# Altium PCB currentAmp.PcbDoc
Units mil, origin at the board's own origin, x right, y up, seen from the top; angles counter-clockwise.
Board outline 6000 x 4000 mil, 2 copper layers (Top Layer, Bottom Layer); 16 components, 19 nets, 72 pads, 0 vias.
Unrouted connection lines stored in the file: 8.
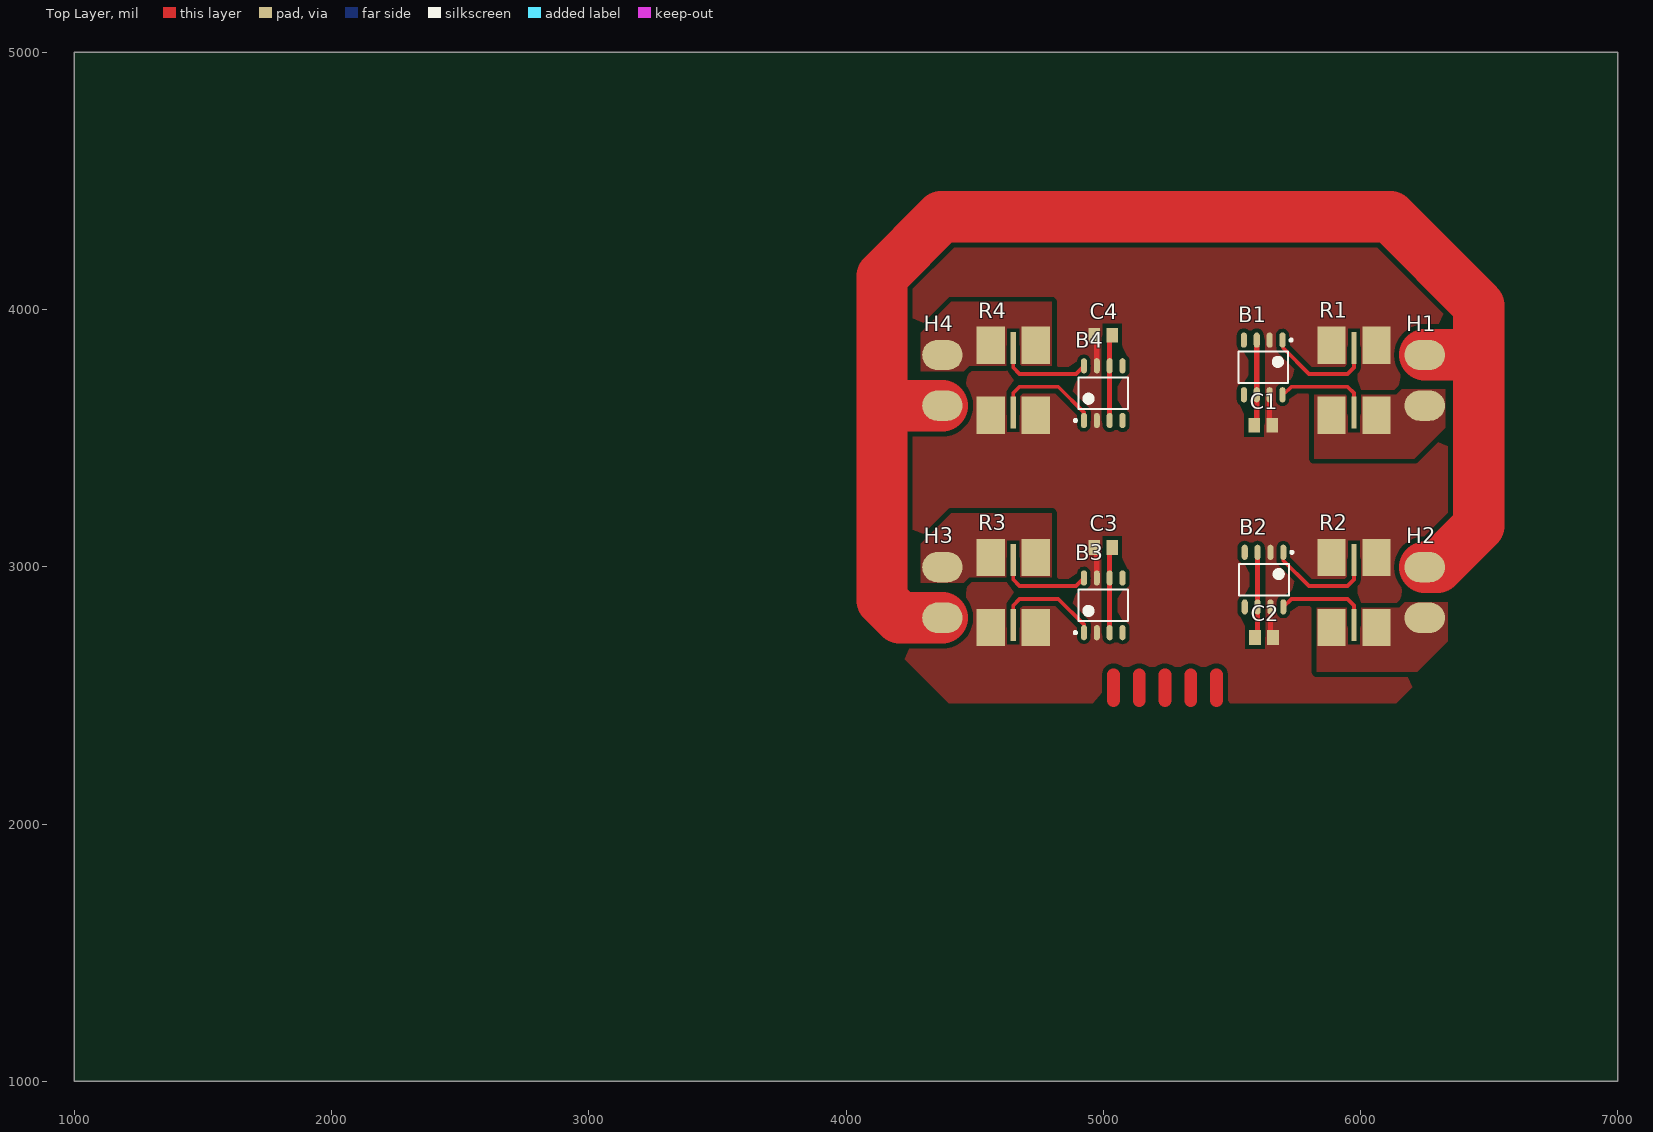
[diagram p0: Top Layer view]
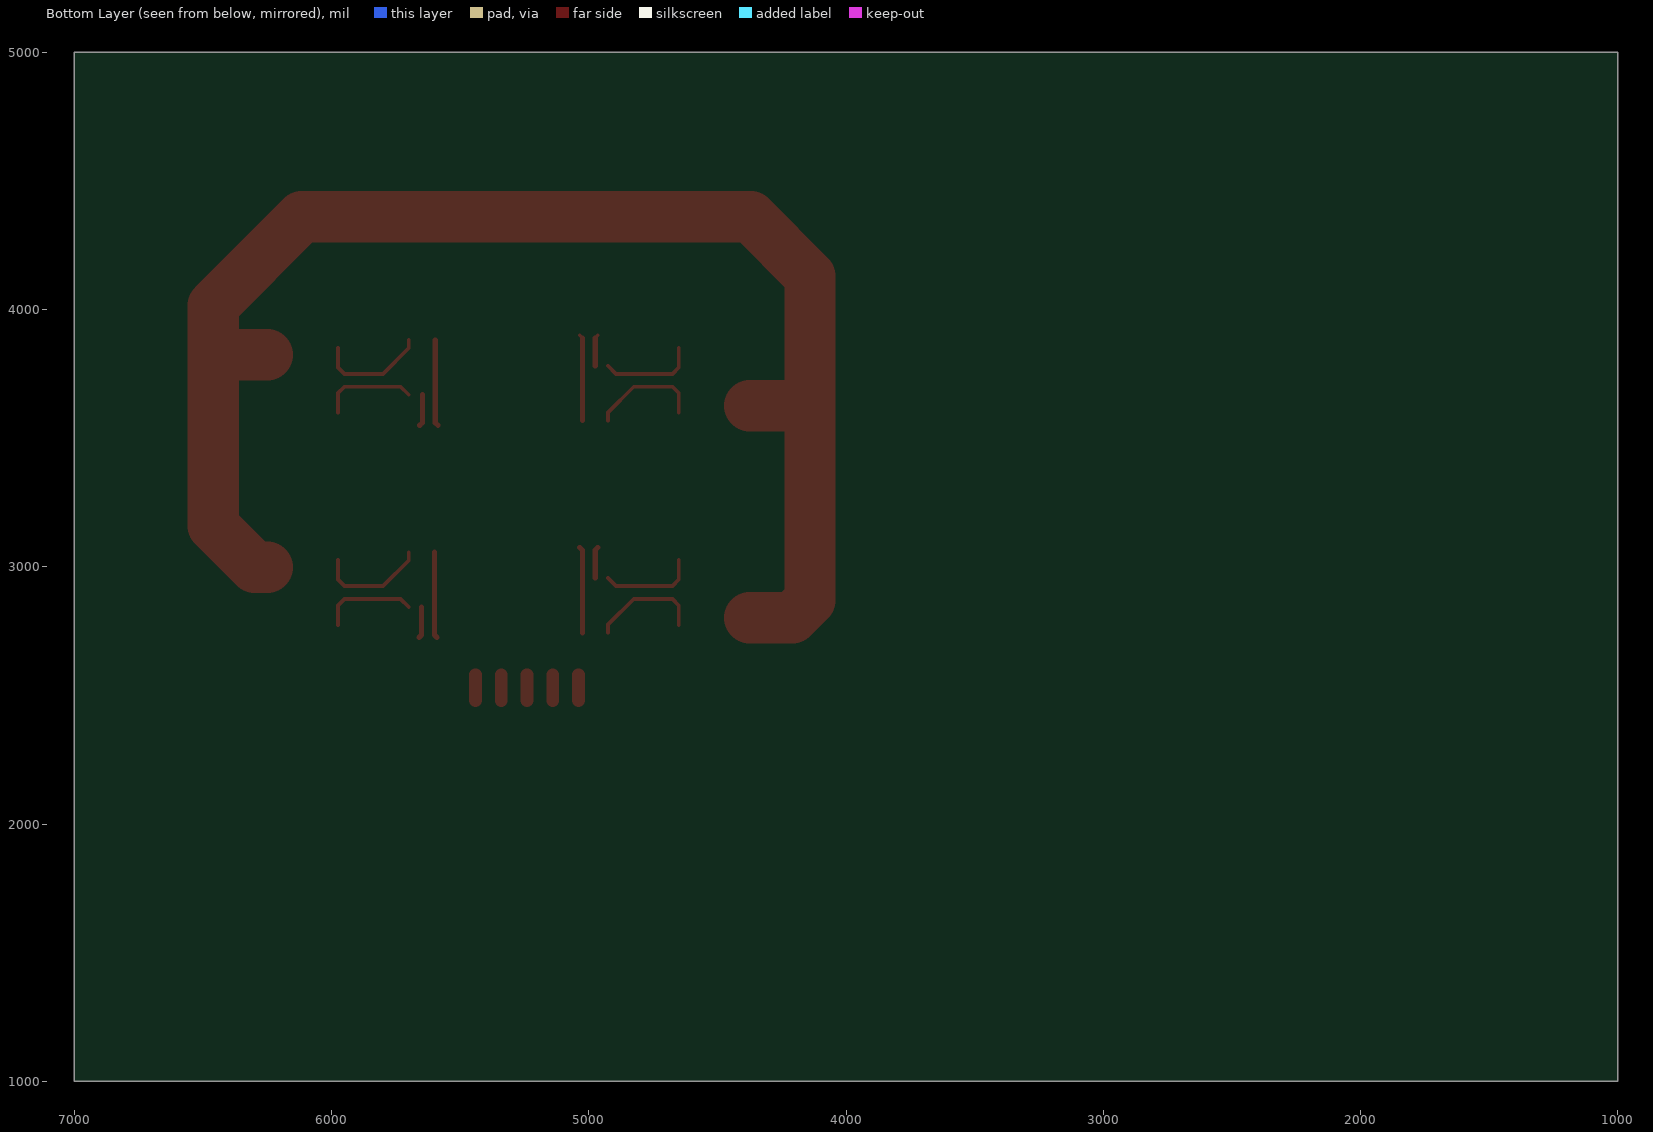
[diagram p1: Bottom Layer view, seen from below]
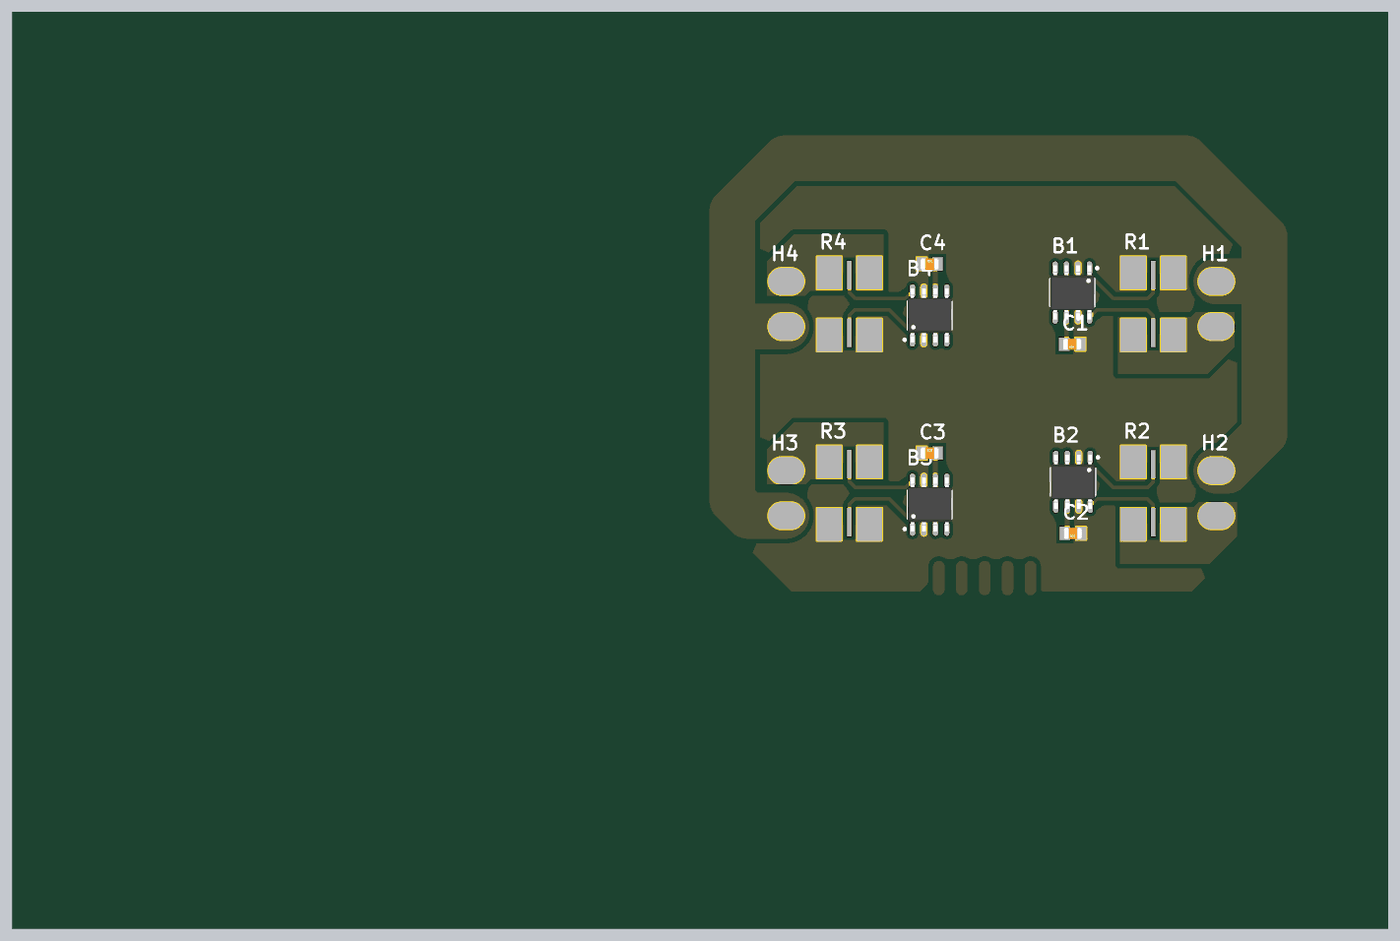
[diagram p2: 3D render of the assembled board from above, using the file's embedded part models]

## Layer stack, top to bottom
Top Solder: solder mask 0.4, Solder Resist, Dk 3.5
Top Layer: signal copper 1.4
Dielectric 1: dielectric 12.6, FR-4, Dk 4.8
Bottom Layer: signal copper 1.4
Bottom Solder: solder mask 0.4, Solder Resist, Dk 3.5

## Board outline
1000,1000 7000,1000 7000,5000 1000,5000

## Design rules (kind name [scope] priority, off if disabled: settings)
Clearance [All] p1: gap=10 ignorepadtopadclearanceinfootprint=FALSE except(0: Arc-Hole Track-Hole SMDPad-Hole THPad-Hole Via-Hole Fill-Hole Poly-Hole Region-Hole Text-Hole; 15: SMDPad-Poly; 20: Arc-Poly Track-Poly THPad-Poly Via-Poly Fill-Poly Poly-Poly)
PolygonConnect [All] p1: connectstyle=Direct reliefconductorwidth=10 reliefentries=4 polygonreliefangle="90 Angle" airgapwidth=10
RoutingVias [All] p1: holewidth=28 width=50 viastyle="Through Hole" minholewidth=28 minwidth=50 maxholewidth=28 maxwidth=50
SolderMaskExpansion [All] p1: expansion=4
Width [All] p1: maxlimit=10000 minlimit=10 preferedwidth=10 minimp=50.000000 maximp=50.000000 favimp=50.000000
30 further rules are at their usual default settings.

## Components (designator, comment, footprint, x,y, rotation, side; value= is the part's Value field where it differs from the comment)
B1 "INA282AIDR" SOIC127P600X175-8N 5621.81,3775 r270 top
B2 "INA282AIDR" SOIC127P600X175-8N 5625,2950 r270 top
B3 "INA282AIDR" SOIC127P600X175-8N 5000,2850 r90 top
B4 "INA282AIDR" SOIC127P600X175-8N 5000,3675 r90 top
C1 "4.7uF (475) 10% 25V" 0805_C 5621.81,3550 r180 top
C2 "4.7uF (475) 10% 25V" 0805_C 5625,2725 r180 top
C3 "4.7uF (475) 10% 25V" 0805_C 5000,3075 r0 top
C4 "4.7uF (475) 10% 25V" 0805_C 5000,3900 r0 top
H1 "XTx0" "XT30-PW - SMD" 6250,3725 r270 top
H2 "XTx0" "XT30-PW - SMD" 6250,2900 r270 top
H3 "XTx0" "XT30-PW - SMD" 4375,2900 r90 top
H4 "XTx0" "XT30-PW - SMD" 4375,3725 r90 top
R1 "Res Kelvin" OARS-XP 5975,3725 r270 top
R2 "Res Kelvin" OARS-XP 5975,2900 r270 top
R3 "Res Kelvin" OARS-XP 4650,2900 r90 top
R4 "Res Kelvin" OARS-XP 4650,3725 r90 top

## Footprints (in the part's own frame and the unit in brackets; to place one, negate y for a bottom-side part, rotate by r counter-clockwise, add the part's x,y. Pads: shape width x height; smd on the part's side, far side on the other; paste and mask are expansions set on the pad)
0805_C [mm]
  rect 1.16x1.47 smd: 1(-0.89,0) 2(0.89,0)
  body extent -1,-0.62 1,0.63, height 0.77
OARS-XP [mm]
  rect 3.67x2.79 smd: 1(-3.45,2.22) 1(-3.45,-2.22) 2(3.45,2.22) 2(3.45,-2.22)
  rect 3.16x0.51 smd: 3(-3.195,0) 4(3.2,0)
SOIC127P600X175-8N [mm] "SOIC, 8-Leads, Body 4.90x3.90mm, Pitch 1.27mm, IPC Medium Density"
  oval 1.5x0.6 smd: 1(-2.7,1.905) 2(-2.7,0.635) 3(-2.7,-0.635) 4(-2.7,-1.905) 5(2.7,-1.905) 6(2.7,-0.635) 7(2.7,0.635) 8(2.7,1.905)
  silkscreen extent -2.82,-2.45 1.55,2.88, body extent -3,-2.45 3,2.45, height 1.75
"XT30-PW - SMD" [mm]
  oval 3x4 smd: NEG(2.5,0) POS(-2.5,0)

## Part data
B1 B2 B3 B4: "Current Sense Amplifiers Bidirectional,Hi Acc Crnt Shunt Mon", Manufacturer_Name="Texas Instruments", Mouser Part Number=595-INA282AIDR, Datasheet Link=http://www.ti.com/lit/ds/symlink/ina282.pdf, Geometry.Height=1.75mm, Manufacturer_Part_Number=INA282AIDR, Mouser Price/Stock=https://www.mouser.com/Search/Refine.aspx?Keyword=595-INA282AIDR
C1 C2 C3 C4: library part "0805 4.7uF (475) 10% 25V", "????", Package=0805, SuppliersPartNumber=C1779, ComponentLink1Description=?????, ComponentLink1URL=http://www.szlcsc.com/product/details_2131.html, Supplier=LC

## Nets (pads, with @x,y where several pads share a name; then routed paths per layer and width w, separated by ;. In a path a pad name is that pad's centre, name@x,y a point inside that pad or via, vN(x,y) a via of type N, cw(c..) or ccw(c..) an arc to the next point about the centre after c; other vN are vias at no path point)
+12: H1.POS H2.POS H3.POS H4.POS | length 5661.7
  Top Layer w200: H3.POS 4208.43,2801.57 4140,2870 4140,3626.57 4143.43,3626.57 ; H4.POS 4143.43,3626.57 ; H2.POS 6298.43,2998.43 6460,3160 6460,3820 ; H1.POS 6456.57,3823.43 6460,3820 ; 4143.43,3626.57 4140,3630 4140,4130 4370,4360 6115.65,4360 6460,4015.65 6460,3820
GND: B1.2 B1.7 B2.2 B2.7 B3.2 B3.7 B4.2 B4.7 C1.1 C2.1 C3.1 C4.1 R1.1 R2.1 R3.1 R4.1 | length 491.4
  Top Layer w15: C4.1 C4.1@4975,3889.96
  Top Layer w20: C3.1 4975,3064.96 B3.7 ; B4.7 C4.1@4975,3889.96 ; B1.7 5646.81,3560.04 C1.1 ; B2.7 5650,2735.04 C2.1
NEG1: H1.NEG R1.2
NEG2: H2.NEG R2.2
NEG3: H3.NEG R3.2
NEG4: H4.NEG R4.2
NetB1_1: B1.1 R1.3 | length 433.9
  Top Layer w15: B1.1@5700,3881.3 5700,3850 5800,3750 5950,3750 5975,3775 R1.3
NetB1_8: B1.8 R1.4 | length 374.3
  Top Layer w15: B1.8@5700,3668.7 5731.3,3700 5950,3700 5975,3675 R1.4
NetB2_1: B2.1 R2.3 | length 433.9
  Top Layer w15: B2.1 5700,3025 5800,2925 5950,2925 5975,2950 R2.3
NetB2_8: B2.8 R2.4 | length 374.3
  Top Layer w15: B2.8 5731.3,2875 5950,2875 5975,2850 R2.4
NetB3_1: B3.1 R3.3 | length 433.9
  Top Layer w15: R3.3 4650,2850 4675,2875 4825,2875 4925,2775 B3.1
NetB3_8: B3.8 R3.4 | length 374.3
  Top Layer w15: R3.4 4650,2950 4675,2925 4893.7,2925 B3.8
NetB4_1: B4.1 R4.3 | length 433.9
  Top Layer w15: R4.3 4650,3675 4675,3700 4825,3700 4925,3600 B4.1
NetB4_8: B4.8 R4.4 | length 374.3
  Top Layer w15: R4.4 4650,3775 4675,3750 4893.7,3750 B4.8
SEN1: B1.5 | length 100
  Top Layer w50: 5340,2480 5340,2580
SEN2: B2.5 | length 100
  Top Layer w50: 5240,2480 5240,2580
SEN3: B3.5 | length 100
  Top Layer w50: 5140,2480 5140,2580
SEN4: B4.5 | length 100
  Top Layer w50: 5040,2480 5040,2580
VCC: B1.3 B1.6 B2.3 B2.6 B3.3 B3.6 B4.3 B4.6 C1.2 C2.2 C3.2 C4.2 | length 1441.8
  Top Layer w15: C4.2@5025,3889.96 C4.2
  Top Layer w20: B3.3 B3.6 5025,3064.96 C3.2 ; B4.3 B4.6 C4.2@5025,3889.96 ; C1.2 5596.81,3560.04 B1.6 B1.3 ; C2.2 5600,2735.04 B2.6 B2.3
  Top Layer w50: 5440,2480 5440,2580
pads on no net: B1.4 B2.4 B3.4 B4.4

## Polygon pours and split planes (outlines as drawn)
GND on Top Layer "Top Layer-GND" (solid, remove dead copper, pour order 8): 5253.27,4533.27 5060,4340 4280,4340 4030,4090 4030,2840 4400,2470 6140,2470 6560,2890 6560,4010 6440,4010 5870,4580
NEG1 on Top Layer "Top Layer-NEG1" (solid, pour order 6): 6330,3690 6330,3540 6210,3420 5820,3420 5820,3668.7 6140,3668.7 6161.3,3690
NEG2 on Top Layer "Top Layer-NEG2" (solid, pour order 4): 6340,2861.3 6340,2711.3 6220,2591.3 5830,2591.3 5830,2840 6150,2840 6171.3,2861.3
NEG3 on Top Layer "Top Layer-NEG3" (solid, pour order 2): 4290,2938.7 4290,3088.7 4410,3208.7 4800,3208.7 4800,2960 4480,2960 4458.7,2938.7
NEG4 on Top Layer "Top Layer-NEG4" (solid, pour order 0): 4290,3760 4290,3910 4410,4030 4800,4030 4800,3781.3 4480,3781.3 4458.7,3760